# Altium PCB pcb.PcbDoc (part 1 of 2)
Units mm, origin at the board's own origin, x right, y up, seen from the top; angles counter-clockwise.
Board outline 168.75 x 59.75 mm, 2 copper layers (Top Layer, Bottom Layer); 142 components, 131 nets, 492 pads, 85 vias.
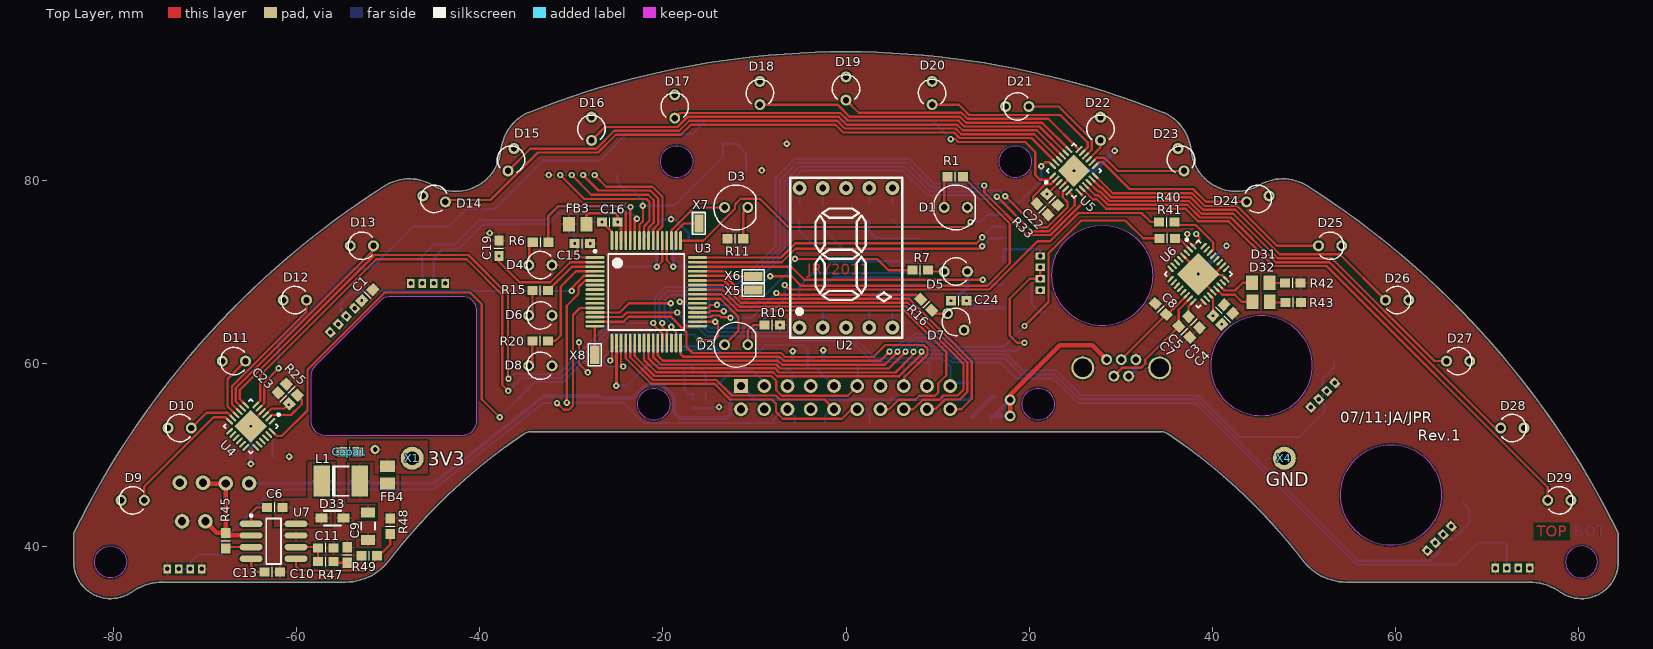
[diagram p0: Top Layer view]
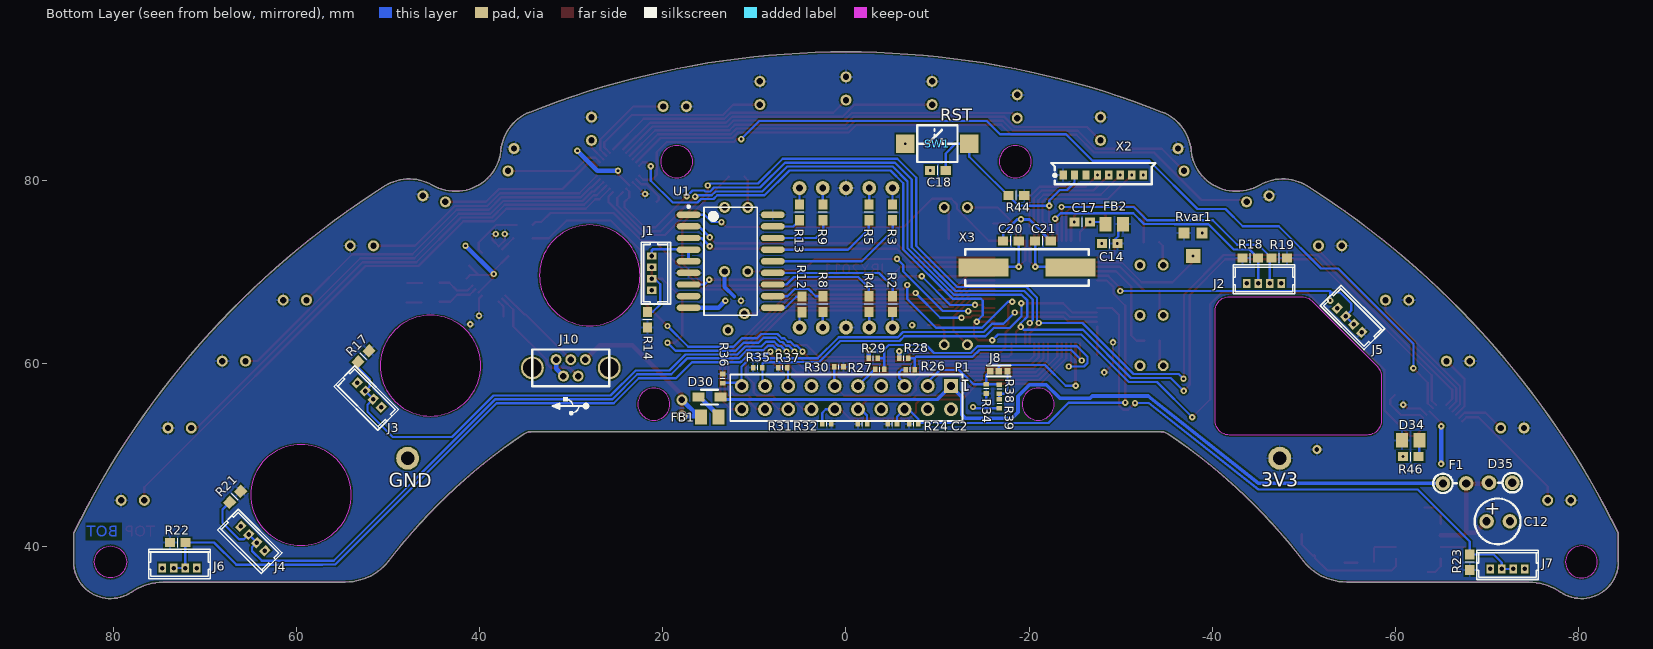
[diagram p1: Bottom Layer view, seen from below]

## Layer stack, top to bottom
Top Layer: signal copper 0.0356
Dielectric: dielectric 0.32, FR-4, Dk 4.8
Bottom Layer: signal copper 0.0356

## Board outline
-78.066,34.976 cw(c-74.626,30.06) -74.626,36.06 -54.704,36.06 ccw(c-54.704,42.06) -49.947,38.403 cw(c0,0.007) -35.249,52.223 -35.248,52.222 cw(c-34.369,51.007) -34.369,52.507 34.369,52.507 cw(c34.369,51.007) 35.248,52.222 35.249,52.223 cw(c0,0.007) 49.947,38.404 49.947,38.403 ccw(c54.704,42.06) 54.704,36.06 74.626,36.06 cw(c74.626,30.06) 78.066,34.976 ccw(c80.365,38.263) 84.376,38.263 84.376,41.441 ccw(c0,0.007) 50.405,79.35 ccw(c47.724,75.13) 45.2,79.446 cw(c42.675,83.762) 37.7,83.267 ccw(c32.724,82.773) 34.563,87.422 ccw(c0,0.007) 0,94.007 ccw(c0,0.007) -34.563,87.422 ccw(c-32.724,82.773) -37.7,83.267 cw(c-42.675,83.762) -45.2,79.446 ccw(c-47.724,75.13) -50.405,79.35 ccw(c0,0.007) -84.376,41.441 -84.376,38.263 ccw(c-80.365,38.263)
cut-out: 78.616,38.263 ccw(c80.366,38.263) 80.366,36.513 ccw(c80.366,38.263) 82.116,38.263 ccw(c80.366,38.263) 80.366,40.013 ccw(c80.366,38.263)
cut-out: -80.364,36.513 cw(c-80.364,38.263) -82.114,38.263 cw(c-80.364,38.263) -80.364,40.013 cw(c-80.364,38.263) -78.614,38.263 cw(c-80.364,38.263)
cut-out: -58.48,53.687 ccw(c-56.929,53.687) -56.929,52.137 ccw(c-56.929,52.187) -56.929,52.137 -41.904,52.137 ccw(c-41.904,53.687) -40.354,53.687 ccw(c-40.404,53.687) -40.354,53.688 -40.354,65.712 ccw(c-41.904,65.712) -41.904,67.263 -49.779,67.263 ccw(c-49.779,65.712) -50.875,66.809 ccw(c-50.84,66.773) -50.877,66.807 ccw(c-50.854,66.762) -50.89,66.798 -58.027,59.661 ccw(c-57.992,59.625) -58.037,59.647 ccw(c-56.929,58.562) -58.48,58.562 ccw(c-58.429,58.562) -58.48,58.562
cut-out: 28.001,64.084 cw(c28.001,69.584) 22.501,69.584 cw(c28.001,69.584) 28.001,75.084 cw(c28.001,69.584) 33.501,69.584 cw(c28.001,69.584)
cut-out: 45.393,54.211 cw(c45.393,59.711) 39.893,59.711 cw(c45.393,59.711) 45.393,65.211 cw(c45.393,59.711) 50.893,59.711 cw(c45.393,59.711)
cut-out: 59.558,40.091 cw(c59.558,45.591) 54.058,45.591 cw(c59.558,45.591) 59.558,51.091 cw(c59.558,45.591) 65.058,45.591 cw(c59.558,45.591)
cut-out: 78.616,38.263 ccw(c80.366,38.263) 80.366,36.513 ccw(c80.366,38.263) 82.116,38.263 ccw(c80.366,38.263) 80.366,40.013 ccw(c80.366,38.263)
cut-out: 21.001,53.757 cw(c21.001,55.507) 19.251,55.507 cw(c21.001,55.507) 21.001,57.257 cw(c21.001,55.507) 22.751,55.507 cw(c21.001,55.507)
cut-out: 18.501,80.257 cw(c18.501,82.007) 16.751,82.007 cw(c18.501,82.007) 18.501,83.757 cw(c18.501,82.007) 20.251,82.007 cw(c18.501,82.007)
cut-out: -18.499,80.257 cw(c-18.499,82.007) -20.249,82.007 cw(c-18.499,82.007) -18.499,83.757 cw(c-18.499,82.007) -16.749,82.007 cw(c-18.499,82.007)
cut-out: -20.999,53.757 cw(c-20.999,55.507) -22.749,55.507 cw(c-20.999,55.507) -20.999,57.257 cw(c-20.999,55.507) -19.249,55.507 cw(c-20.999,55.507)

## Design rules (kind name [scope] priority, off if disabled: settings)
Clearance poly_to_keepout_clearance [InPolygon vs OnLayer('Multi-Layer')] p1: gap=0.17
Clearance [All] p2: gap=0.17
ComponentClearance [All] p1: gap=0.1 collisioncheckmode=3 verticalgap=0.254 showdistances=FALSE
FabricationTestPointUsage TestPointUsage [All] p1: valid=0 allowmultiple=FALSE
FabricationTestpoint Testpoint [All] p1: side=3 testpointundercomponent=TRUE minsize=1.016 maxsize=2.54 preferedsize=1.524 minholesize=0 maxholesize=1.016 preferedholesize=0.813 testpointgrid=0.025 allowsidetop=TRUE allowsidebottom=TRUE usegrid=TRUE gridtolerance=0
HoleSize [All] p1: absolutevalues=TRUE maxlimit=50 minlimit=0.25 maxpercent=80.000 minpercent=20.000
HoleToHoleClearance [All] p1: gap=0.2 allowstackedmicrovias=TRUE
MinimumSolderMaskSliver [All] p1: minsoldermaskwidth=0.01
NetAntennae [All] p1 off: netantennaetolerance=0
PolygonConnect [All] p1: connectstyle=Relief reliefconductorwidth=0.254 reliefentries=4 polygonreliefangle="90 Angle" airgapwidth=0.254
RoutingVias [All] p1: holewidth=0.711 width=1.27 viastyle="Through Hole" minholewidth=0.3 minwidth=0.7 maxholewidth=5 maxwidth=10
SilkToSilkClearance [All] p1 off: silktosilkclearance=0.2
SilkscreenOverComponentPads [All] p1 off: minsilkscreentomaskgap=0.254
SolderMaskExpansion [All] p1: expansion=0.102
Width [All] p1: maxlimit=5 minlimit=0.25 preferedwidth=0.25
19 further rules are at their usual default settings.

## Components (designator, comment, footprint, x,y, rotation, side; value= is the part's Value field where it differs from the comment)
C1 "C" 0603C -52.9,66.825 r315 top
C2 "C" 0402 -6.9,53.35 r270 bottom
C3 "C" 0603c 40.1,65.175 r315 top
C4 "C" 0603c 41.05,64.225 r315 top
C5 "C" 0603c 37.425,65.075 r225 top
C6 "C" 0603C -63.25,44.225 r270 top
C7 "C" 0603c 36.375,64.025 r225 top
C8 "C" 0603c 35,65.3 r45 top
C9 "C" 1206 -52.2,40.7 r90 top
C10 "C" 0603C -57.7,38.3 r270 top
C11 "C" 0603C -57.7,39.8 r270 top
C12 "C_pol" Cpol -70,42.7 r180 bottom
C13 "C" 0603C -63.55,37.175 r270 top
C14 "C" 0603C -29.65,73.05 r90 bottom
C15 "C" 0603c -29.65,73.05 r270 top
C16 "C" 0603c -26.65,75.4 r270 top
C17 "C" 0603C -26.65,75.4 r90 bottom
C18 "C" 0603C -9.2,81.05 r270 bottom
C19 "C" 0603C -37.925,71.7 r0 top
C20 "C" 0603c -18.875,73.35 r90 bottom
C21 "C" 0603c -20.675,73.35 r270 bottom
C22 "C" 0603c 21.95,78.475 r225 top
C23 "C" 0603c -60.85,55.55 r45 top
C24 "C" 0603c 11.475,66.8 r270 top
Capa1 "C" 0603C -53.4,50.3 r90 top
D1 "led" LED5MM 12,77.002 r0 top
D2 "led" LED5MM -12,62 r0 top
D3 "led" LED5MM -12,77.002 r0 top
D4 "led" LED3mm -33.393,70.706 r0 top
D5 "led" LED3mm 12,70.002 r0 top
D6 "led" LED3mm -33.393,65.206 r0 top
D7 "led" LED3mm 12,64.502 r315 top
D8 "led" LED3mm -33.393,59.706 r0 top
D9 "led" LED3mm -77.942,44.998 r0 top
D10 "led" LED3mm -72.812,52.899 r0 top
D11 "led" LED3mm -66.883,60.216 r0 top
D12 "led" LED3mm -60.222,66.881 r0 top
D13 "led" LED3mm -52.901,72.81 r0 top
D14 "led" LED3mm -45,77.94 r345 top
D15 "led" LED3mm -36.606,82.217 r255 top
D16 "led" LED3mm -27.812,85.595 r270 top
D17 "led" LED3mm -18.712,88.033 r270 top
D18 "led" LED3mm -9.408,89.507 r270 top
D19 "led" LED3mm 0,90 r270 top
D20 "led" LED3mm 9.408,89.507 r270 top
D21 "led" LED3mm 18.712,88.033 r0 top
D22 "led" LED3mm 27.812,85.595 r270 top
D23 "led" LED3mm 36.606,82.217 r285 top
D24 "led" LED3mm 45,77.94 r195 top
D25 "led" LED3mm 52.901,72.81 r180 top
D26 "led" LED3mm 60.222,66.881 r180 top
D27 "led" LED3mm 66.883,60.216 r180 top
D28 "led" LED3mm 72.812,52.899 r180 top
D29 "led" LED3mm 77.942,44.998 r180 top
D30 "Schottky" SOD323 13.725,56.275 r90 bottom
D31 "led" 0805 44.375,68.775 r270 top
D32 "led" 0805 44.4,66.7 r270 top
D33 "Schottky" SOD323 -57.3,43.05 r270 top
D34 "led" 0805 -60.75,51.55 r270 bottom
D35 "Zener" R_dil_vertical -72.8,46.925 r0 bottom
F1 "Fuse 1" R_DIL_vertical -65.225,46.85 r180 bottom
FB1 "FB" 0805 15.825,54.1 r270 bottom
FB2 "FB" 0805 -30.275,75.175 r90 bottom
FB3 "FB" 0805 -30.275,75.175 r270 top
FB4 "FB" 0805 -50.1,46.825 r0 top
J1 "MOLEX_embase_4_voies" MOLEX53047-0410 21.225,67.95 r90 bottom
J2 "MOLEX_embase_4_voies" MOLEX53047-0410 -47.55,68.7 r0 bottom
J3 "MOLEX_embase_4_voies" MOLEX53047-0410 53.427,57.827 r225 bottom
J4 "MOLEX_embase_4_voies" MOLEX53047-0410 66.152,42.152 r225 bottom
J5 "MOLEX_embase_4_voies" MOLEX53047-0410 -56.352,63.348 r45 bottom
J6 "MOLEX_embase_4_voies" MOLEX53047-0410 70.95,37.6 r0 bottom
J7 "MOLEX_embase_4_voies" MOLEX53047-0410 -74.15,37.5 r0 bottom
J8 "solder_bridge_3" solder_bridge_3 -16.725,61 r0 bottom
J10 "CON USB FEMALE" mini_USB_vertical 30.075,60.375 r90 bottom
L1 "L" C1812 -55.2,47.1 r0 top
P1 "Header 10X2" header2x10 -11.45,57.49 r0 bottom
R1 "R" 0603C 11.1,80.35 r270 top
R2 "R" 0603c -5.1,67.3 r0 bottom
R3 "R" 0603C -5.1,77.3 r0 bottom
R4 "R" 0603C -2.5,67.3 r0 bottom
R5 "R" 0603C -2.5,77.3 r0 bottom
R6 "R" 0603C -34.225,73.2 r270 top
R7 "R" 0603C 8.95,70.15 r90 top
R8 "R" 0603c 2.5,67.3 r0 bottom
R9 "R" 0603c 2.525,77.3 r0 bottom
R10 "R" 0603C -8.925,64.15 r270 top
R11 "R" 0603C -11.225,73.575 r90 top
R12 "R" 0603c 4.825,67.25 r0 bottom
R13 "R" 0603C 5.1,77.3 r0 bottom
R14 "R" 0603c 21.705,65.598 r0 bottom
R15 "R" 0603c -34.25,67.925 r270 top
R16 "R" 0603c 9.375,65.775 r45 top
R17 "R" 0603C 53.325,60.125 r225 bottom
R18 "R" 0603c -43.325,71.475 r270 bottom
R19 "R" 0603c -48.175,71.475 r90 bottom
R20 "R" 0603c -34.275,62.425 r270 top
R21 "R" 0603C 67.35,44.775 r225 bottom
R22 "R" 0603c 72.175,40.375 r90 bottom
R23 "R" 0603C -68.15,39.075 r0 bottom
R24 "R" 0402 -5.57,53.35 r90 bottom
R25 "R" 0603C -59.95,56.5 r45 top
R26 "R" 0402 -7.525,59.275 r90 bottom
R27 "R" 0402 -4.175,59.3 r90 bottom
R28 "R" 0402 -5.825,60.525 r270 bottom
R29 "R" 0402 -2.475,60.525 r270 bottom
R30 "R" 0402 1.275,59.575 r270 bottom
R31 "R" 0402 2.6,53.35 r270 bottom
R32 "R" 0402 -2.3,53.35 r90 bottom
R33 "R" 0603C 20.875,77.4 r225 top
R34 "R" 0402 -15.325,57.675 r0 bottom
R35 "R" 0402 9.15,59.5 r90 bottom
R36 "R" 0402 13.475,57.8 r180 bottom
R37 "R" 0402 6.4,59.5 r90 bottom
R38 "R" 0402 -16.75,56.65 r180 bottom
R39 "R" 0402 -16.75,55.05 r180 bottom
R40 "R" 0603c 35.9,75.4 r90 top
R41 "R" 0603c 35.95,73.625 r90 top
R42 "R" 0603c 49.675,68.75 r90 top
R43 "R" 0603c 49.7,66.625 r90 top
R44 "R" 0603C -17.775,78.3 r270 bottom
R45 "R" 0603C -67.775,41.45 r180 top
R46 "R" 0603C -62.55,49.775 r90 bottom
R47 "R" 0603C -54.5,38.175 r0 top
R48 "R" 0603C -49.8,41.3 r0 top
R49 "R" 0603C -52.95,38.95 r270 top
Rvar1 "Rvar" TC33X-2 -38.925,74.2 r0 bottom
SW1 "subminswitch" microswitch -6.975,83.975 r180 bottom
U1 "MCP23S08" SOIC18 17.2,76.2 r180 bottom
U2 "TDSR1350" TDSR1350 0,71.5 r0 top
U3 "MSP430F233" PQFP-64 -21.825,67.775 r0 top
U4 "A6282EES-T" QFN24 -62.725,53.65 r135 top
U5 "A6282EES-T" QFN24 22.6,80.45 r315 top
U6 "FT232RQ" FT232RQ_QFN32_M 38.5,69.725 r315 top
U7 "TPS54233" SOIC127P600-8M -62.55,40.525 r0 top
X1 "TP" TP#1 -44.9,47.1 r0 top
X2 "MSP430_JTAG_MOLEX_125" JTAG_MSP_SMALL -23.725,80.55 r180 bottom
X3 "8MHz" Quartz_2 -24.525,70.45 r0 bottom
X4 "TP" TP#2 36.45,43.575 r0 top
X5 "TP" cms_pad -10.125,67.975 r0 top
X6 "TP" cms_pad -10.125,69.475 r0 top
X7 "TP" cms_pad -16.075,75.25 r90 top
X8 "TP" cms_pad -27.45,60.9 r90 top

## Footprints (in the part's own frame and the unit in brackets; to place one, negate y for a bottom-side part, rotate by r counter-clockwise, add the part's x,y. Pads: shape width x height; smd on the part's side, far side on the other; paste and mask are expansions set on the pad)
0402 [mm] "SMD 0402 package, 0.6x1.5mm"
  rect 0.6x0.5 smd: 1(0,0) 2(0,1)
  silkscreen extent -0.25,0.5 0.25,0.5, body extent -0.25,0 0.25,1, height 0.7
0603C [mm] "standard 0603 FP"
  rect 1x1.1 smd: 1(0,0) 2(0,1.7)
  silkscreen extent -0.5,0.85 0.5,0.85, body extent -0.45,-0.25 0.45,2, height 0.7
0603c [mm] "standard 0603 FP"
  rect 1x1.1 smd: 1(0,0) 2(0,1.7)
  silkscreen extent -0.5,0.85 0.5,0.85, body extent -0.45,-0.25 0.45,2, height 0.7
0805 [mm] "standard 0805 FP"
  rect 1.6x1.3 smd: 1(0,0) 2(0,1.9)
  body extent -0.75,0 0.75,2, height 1
1206 [mm] "1206 1.6x3.2mm"
  rect 1.1x1.5 smd: 1(-0.025,0.025) 2(2.975,0.025)
  silkscreen extent 1.08,-0.72 1.88,0.78, body extent -0.17,-0.55 3.12,0.63, height 0.55
C1812 [mm] "Chip Capacitor; Body 4.5 x 3.2 mm (LxW typ)"
  rect 1.8x3.4 smd: 1(-2.075,0) 2(2.075,0)
  silkscreen extent -0.87,-1.6 0.87,1.6
cms_pad [mm] "testpoint_CMS"
  rect 2x1 smd: 1(0,0)
  silkscreen extent -1.2,-0.7 1.2,0.7, body extent -1.2,-0.7 1.2,0.7, height 1
Cpol [mm] "Capa electrolytique"
  round 1.6 hole 0.9: 1(0,0) 2(2.54,0)
  silkscreen extent -1.3,-2.5 3.7,2.5
FT232RQ_QFN32_M [mm] "32-Pin Quad Flat No-Lead 0.5 mm Pitch, IPC Low Density"
  oval 0.9x0.25 smd: 1(-2.55,1.75) 2(-2.55,1.25) 3(-2.55,0.75) 4(-2.55,0.25) 5(-2.55,-0.25) 6(-2.55,-0.75) 7(-2.55,-1.25) 8(-2.55,-1.75) 17(2.55,-1.75) 18(2.55,-1.25) 19(2.55,-0.75) 20(2.55,-0.25) 21(2.55,0.25) 22(2.55,0.75) 23(2.55,1.25) 24(2.55,1.75)
  rect 3.3x3.3 smd: 4(0,0)
  oval 0.25x0.9 smd: 9(-1.75,-2.55) 10(-1.25,-2.55) 11(-0.75,-2.55) 12(-0.25,-2.55) 13(0.25,-2.55) 14(0.75,-2.55) 15(1.25,-2.55) 16(1.75,-2.55) 25(1.75,2.55) 26(1.25,2.55) 27(0.75,2.55) 28(0.25,2.55) 29(-0.25,2.55) 30(-0.75,2.55) 31(-1.25,2.55) 32(-1.75,2.55)
  silkscreen extent -3.67,-2.6 2.6,2.6, body extent -2.58,-2.58 2.58,2.58, height 0.8
header2x10 [mm] "header 2x10 pins, path 2.54mm"
  rect 1.5x1.5 hole 0.9: 1(-0.025,0)
  round 1.5 hole 0.9: 2(-0.025,2.54) 3(2.515,0) 4(2.515,2.54) 5(5.055,0) 6(5.055,2.54) 7(7.595,0) 8(7.595,2.54) 9(10.135,0) 10(10.135,2.54) 11(12.675,0) 12(12.675,2.54) 13(15.215,0) 14(15.215,2.54) 15(17.755,0) 16(17.755,2.54) 17(20.295,0) 18(20.295,2.54) 19(22.835,0) 20(22.835,2.54)
  silkscreen extent -1.3,-1.27 24.1,3.81, body extent -1.1,-1.25 23.9,3.75, height 9
JTAG_MSP_SMALL [mm] "place on the side of the board"
  rect 0.8x1 smd: 1(0,0) 2(1.25,0) 3(2.5,0) 4(3.75,0) 5(5,0) 6(6.25,0) 7(7.5,0) 8(8.75,0)
  silkscreen extent -1.3,-1 10.1,1.3, body extent -1.57,-1.53 10.43,1.97, height 6
LED3mm [mm]
  round 1.2 hole 0.7: 1(-1.27,0) 2(1.27,0)
  silkscreen extent -1.49,-1.5 1.15,1.5, body extent -1.48,-1.53 1.51,1.47, height 5.5
LED5MM [mm]
  round 1.2 hole 0.7: 1(-1.27,0) 2(1.27,0)
  silkscreen extent -2.44,-2.45 2.13,2.45, body extent -2.47,-2.47 2.51,2.52, height 9.5
microswitch [mm] "subminiature tact switch for SMT, case 6x4mm, total 7.3x4mm"
  rect 2x2 smd: 1(-0.5,0) 2(6.5,0)
  silkscreen extent 0.8,-2 5.2,2, body extent 0.02,-1.75 6.02,1.75, height 2.2
mini_USB_vertical [mm] "RECEPTACLE, MINI-USB, TYPE-B, VERT"
  round 1.2 hole 0.7: 1(0,-1.6) 2(-1.8,-0.8) 3(0,0) 4(-1.8,0.8) 5(0,1.6)
  round 2.5 hole 2: 6(-0.9,-4.2) 6(-0.9,4.2)
  silkscreen extent -2.9,-4.2 1.1,4.2, body extent -2.9,-4.3 1.1,4.3, height 9.2
MOLEX53047-0410 [mm] "EMBASE DROITE 4 VOIES"
  rect 0.8x1 hole 0.5: 1(3.75,0) 2(2.5,0) 3(1.25,0) 4(0,0)
  silkscreen extent -1.5,-2.05 5.25,1.15, body extent -1.5,-2.05 5.25,1.15, height 4.2
PQFP-64 [mm] "64 leads, Pitch 0.5mm, case 10x10mm, Low Density"
  oval 2.1x0.3 smd: 1(-5.6,3.75) 2(-5.6,3.25) 3(-5.6,2.75) 4(-5.6,2.25) 5(-5.6,1.75) 6(-5.6,1.25) 7(-5.6,0.75) 8(-5.6,0.25) 9(-5.6,-0.25) 10(-5.6,-0.75) 11(-5.6,-1.25) 12(-5.6,-1.75) 13(-5.6,-2.25) 14(-5.6,-2.75) 15(-5.6,-3.25) 16(-5.6,-3.75) 33(5.6,-3.75) 34(5.6,-3.25) 35(5.6,-2.75) 36(5.6,-2.25) 37(5.6,-1.75) 38(5.6,-1.25) 39(5.6,-0.75) 40(5.6,-0.25) 41(5.6,0.25) 42(5.6,0.75) 43(5.6,1.25) 44(5.6,1.75) 45(5.6,2.25) 46(5.6,2.75) 47(5.6,3.25) 48(5.6,3.75)
  oval 0.3x2.1 smd: 17(-3.75,-5.6) 18(-3.25,-5.6) 19(-2.75,-5.6) 20(-2.25,-5.6) 21(-1.75,-5.6) 22(-1.25,-5.6) 23(-0.75,-5.6) 24(-0.25,-5.6) 25(0.25,-5.6) 26(0.75,-5.6) 27(1.25,-5.6) 28(1.75,-5.6) 29(2.25,-5.6) 30(2.75,-5.6) 31(3.25,-5.6) 32(3.75,-5.6) 49(3.75,5.6) 50(3.25,5.6) 51(2.75,5.6) 52(2.25,5.6) 53(1.75,5.6) 54(1.25,5.6) 55(0.75,5.6) 56(0.25,5.6) 57(-0.25,5.6) 58(-0.75,5.6) 59(-1.25,5.6) 60(-1.75,5.6) 61(-2.25,5.6) 62(-2.75,5.6) 63(-3.25,5.6) 64(-3.75,5.6)
  silkscreen extent -5.72,-4.15 4.15,4.57, body extent -5,-5 5,5, height 1.6
QFN24 [mm] "QFN 24 pins, 4x4mm, 0.5mm"
  oval 0.25x0.95 smd: 1(-0.013,0.004) 2(0.487,0.004) 3(0.987,0.004) 4(1.487,0.004) 5(1.987,0.004) 6(2.487,0.004) 13(2.487,4.054) 14(1.987,4.054) 15(1.487,4.054) 16(0.987,4.054) 17(0.487,4.054) 18(-0.013,4.054)
  oval 0.95x0.25 smd: 7(3.262,0.779) 8(3.262,1.279) 9(3.262,1.779) 10(3.262,2.279) 11(3.262,2.779) 12(3.262,3.279) 19(-0.788,3.279) 20(-0.788,2.779) 21(-0.788,2.279) 22(-0.788,1.779) 23(-0.788,1.279) 24(-0.788,0.779)
  rect 2.5x2.5 smd: 25(1.237,2.029)
  silkscreen extent -0.86,-1.15 3.34,4.13, body extent -0.84,-0.05 3.31,4.1, height 1
Quartz_2 [mm]
  rect 5.5x2 smd: 1(0,0) 2(9.5,0)
  silkscreen extent -2,-2 11.5,2
R_dil_vertical [mm] "DIL resistor with vertical placement"
  round 1.6 hole 0.9: 1(0,0) 2(2.54,0)
  silkscreen extent -1.06,-1.06 1.53,1.06, body extent -1.24,-1.25 2.95,1.25, height 10.9
R_DIL_vertical [mm] "DIL resistor with vertical placement"
  round 1.6 hole 0.9: 1(0,0) 2(2.54,0)
  silkscreen extent -1.06,-1.06 1.53,1.06, body extent -1.24,-1.25 2.95,1.25, height 10.9
SOD323 [mm] "SOD323F 1.8x1.35mm, total legth 2.7mm, lead width 0.4mm"
  rect 1x1.3 smd: 1(0,0) 2(0,2.4)
  silkscreen extent -0.8,0.3 0.8,2.1
SOIC18 [mm] "low density SOIC18, pitch 1.27mm, case 7.5x11.5mm"
  oval 2.6x0.7 smd: 1(0,0) 2(0,-1.27) 3(0,-2.54) 4(0,-3.81) 5(0,-5.08) 6(0,-6.35) 7(0,-7.62) 8(0,-8.89) 9(0,-10.16) 10(9.2,-10.16) 11(9.2,-8.89) 12(9.2,-7.62) 13(9.2,-6.35) 14(9.2,-5.08) 15(9.2,-3.81) 16(9.2,-2.54) 17(9.2,-1.27) 18(9.2,0)
  silkscreen extent -0.13,-10.98 7.5,1.02, body extent 0.8,-11.03 8.4,0.87, height 2.65
SOIC127P600-8M [mm] "SOIC, 8-Leads, Body 4.9x3.9mm, Pitch 1.27mm, IPC Low Density"
  oval 2.5x0.7 smd: 1(-2.45,1.905) 2(-2.45,0.635) 3(-2.45,-0.635) 4(-2.45,-1.905) 5(2.45,-1.905) 6(2.45,-0.635) 7(2.45,0.635) 8(2.45,1.905)
  silkscreen extent -2.57,-2.5 0.8,2.93, body extent -2,-2.5 2,2.5, height 1.75
solder_bridge_3 [mm]
  rect 0.7x0.7 smd: 1(0.025,1.875) 2(0.975,1.875) 3(-0.925,1.875)
  silkscreen extent -1.25,1.28 1.3,2.47
TC33X-2 [mm] "Bourns trimmer SMD"
  rect 1.2x1.2 smd: 1(0,0) 2(2,0)
  rect 1.6x1.5 smd: 3(1,2.5)
  body extent -0.5,-0.1 2.5,2.9, height 1.4
TDSR1350 [mil] "Common Anode 7 seg led display"
  round 60 hole 30: 1(-200,-300) 2(-100,-300) 3(0,-300) 4(100,-300) 5(200,-300) 6(200,300) 7(100,300) 8(0,300) 9(-100,300) 10(-200,300)
  silkscreen extent -240,-344 242,345, body extent -239,-344 243,345, height 276
TP#1 [mm] "Test point"
  round 2.5 hole 1.5: 1(-2.5,2.5)
TP#2 [mm] "Test point"
  round 2.5 hole 1.5: 1(11.45,6.025)

## Part data
F1: "Fuse"
J1 J2 J3 J4 J5 J6 J7: "53047-0410 MOLEX"
J10: "connecteur usb femelle"
P1: "Header, 10-Pin, Dual row"
SW1: "subminiature tact switch for SMT"
U1: "SPI 8 IO expander"
U6: "QFN32 UART-USB bridge"
X3: library part Quartz, "Quartz smd"

## Via types
v1: diameter 0.7, hole 0.3, Top Layer to Bottom Layer, tented both sides, 82 vias
v2: diameter 1.2, hole 0.7, Top Layer to Bottom Layer, tented both sides, 2 vias
v3: diameter 1, hole 0.5, Top Layer to Bottom Layer, tented both sides, 1 vias

## Nets (pads, with @x,y where several pads share a name; then routed paths per layer and width w, separated by ;. In a path a pad name is that pad's centre, name@x,y a point inside that pad or via, vN(x,y) a via of type N, cw(c..) or ccw(c..) an arc to the next point about the centre after c; other vN are vias at no path point)
3V3: C2.1 C3.1 C4.1 C14.1 C15.1 C22.1 C23.1 C24.1 Capa1.1 D9.1 D10.1 D11.1 D12.1 D13.1 D14.1 D15.1 D16.1 D17.1 D18.1 D19.1 D20.1 D21.1 D22.1 D23.1 D24.1 D25.1 D26.1 D27.1 D28.1 D29.1 D34.1 FB2.1 FB4.2 J5.4 R14.2 R17.2 R18.1 R19.1 R21.2 R22.2 R23.2 R24.2 R30.2 R31.2 R32.2 R34.2 R35.2 R36.2 R37.2 R44.2 Rvar1.2 U1.6 U1.18 U2.3 U2.8 U3.1 U4.3 U5.3 U6.1 U6.19 X1.1 X2.1 | length 20.8
  Top Layer w0.25: U4.3@-63.426,54.345 -62.746,55.025 -61.375,55.025 C23.1@-60.85,55.55 ; C15.1@-29.35,72.7 -29.35,71.95 -28.925,71.525 U3.1@-27.425,71.525 ; v1(-29.175,62.25) -29.175,59.925 v1(-28.225,58.975) ; C22.1@22.221,78.253 22.221,78.675 U5.3@23.301,79.755 ; v1(37.275,74.1) 37.275,73.425 U6.1@37.934,72.766 38.625,73.456 38.625,73.75 v1(38.275,74.1) ; U6.19@39.773,67.392 40.1,67.064 v1(40.1,65.175)
  Bottom Layer w0.25: FB2.1@-30.275,75.175 -30.275,75.05 -29.75,74.525 -29.75,73.85 -29.35,73.45 C14.1@-29.35,72.7 ; -15.325,55.975 R34.2@-15.325,56.675
  other v1: -60.9,55.45 41.05,64.225 11.475,66.8 -29.65,73.05 21.95,78.475
  other v3: -51.45,50.55
3V3A: C16.1 C17.1 FB2.2 U3.64 | length 4
  Top Layer w0.25: v1(-26.65,75.4) -25.575,74.325 U3.64@-25.575,73.375
  Bottom Layer w0.25: FB2.2@-28.15,75.4 v1(-26.65,75.4)
7S_A: R9.2 U1.16 | length 7.1
  Bottom Layer w0.25: R9.2@2.5,75.6 2.5,74.45 3.29,73.66 U1.16@8,73.66 U1.16@8.1,73.66
7S_B: R13.2 U1.17 | length 3.3
  Bottom Layer w0.25: R13.2@5.1,75.6 5.77,74.93 U1.17@8.1,74.93
7S_C: R8.1 U1.11 | length 6.3
  Bottom Layer w0.25: R8.1@2.5,67.3 3.3,67.3 4.1,68.1 5.612,68.1 6.402,67.31 U1.11@8,67.31 U1.11@8.1,67.31
7S_C\S\: U1.7 U3.46 | length 34.2
  Top Layer w0.25: U3.46@-16.225,70.525 -5.975,70.525 -4.55,69.1 v1(14.95,69.1)
  Bottom Layer w0.25: v1(14.95,69.1) 15.47,68.58 U1.7@17.2,68.58
7S_CLK: U1.1 U3.49 | length 39.3
  Top Layer w0.25: U3.49@-18.075,73.375 -15.6,73.375 -12.125,76.85 -12.125,77.325 -11.5,77.95 -9.4,77.95 -6.32,74.87 13.095,74.87 v1@13.613,75.387
  Bottom Layer w0.25: v1(13.6,75.4) 14.675,75.4 15.475,76.2 U1.1@17.2,76.2
7S_D: R4.1 U1.12 | length 12.4
  Bottom Layer w0.25: R4.1@-2.5,67.3 -2.5,68.25 -1.35,69.4 5.675,69.4 6.495,68.58 U1.12@8.1,68.58
7S_DP: R12.1 U1.10 | length 3.8
  Bottom Layer w0.25: R12.1@4.825,67.25 5.425,67.25 6.635,66.04 U1.10@8,66.04 U1.10@8.1,66.04
7S_E: R2.1 U1.13 | length 14.9
  Bottom Layer w0.25: R2.1@-5.1,67.3 -5.1,68.35 -3.6,69.85 U1.13@8,69.85 U1.13@8.1,69.85
7S_F: R5.2 U1.15 | length 12.5
  Bottom Layer w0.25: R5.2@-2.5,75.6 -2.5,74.675 -0.215,72.39 U1.15@8,72.39 U1.15@8.1,72.39
7S_G: R3.2 U1.14 | length 15.7
  Bottom Layer w0.25: R3.2@-5.1,75.6 -5.1,74.475 -1.745,71.12 U1.14@8.1,71.12
7S_MISO: U1.3 U3.47 | length 34.5
  Top Layer w0.25: U3.47@-16.225,71.025 -7.012,71.025 -5.537,72.5 14.625,72.5 v1(14.9,72.775)
  Bottom Layer w0.3: v1(14.9,72.775) 15.75,73.625 17.165,73.625 U1.3@17.2,73.66
7S_MOSI: U1.2 U3.48 | length 34.8
  Top Layer w0.25: U3.48@-16.225,71.525 -7.106,71.525 -5.531,73.1 14.25,73.1 v1(14.875,73.725)
  Bottom Layer w0.3: v1(14.875,73.725) 16.08,74.93 U1.2@17.2,74.93
AGND: C16.2 C17.2 FB3.2 U3.62 | length 7
  Top Layer w0.3: FB3.2@-28.375,75.175 -28.375,76.15 -28.15,76.375 -25.225,76.375 -24.95,76.1 v1(-24.95,75.4) ; U3.62@-24.575,73.375 C16.2@-24.575,75.025
BUT_N: J4.2 J4.3 R21.1 U3.25 | length 109.4
  Top Layer w0.25: U3.25@-21.575,62.175 -21.575,60.496 -20.499,59.42 -7.771,59.42 -7.326,58.975 5.4,58.975 7.375,60.95 v1(7.375,61.225)
  Bottom Layer w0.25: v1(7.375,61.225) 7.375,61.287 7.983,61.895 8.515,61.895 8.518,61.898 9.031,61.385 10.846,61.385 11.721,60.51 17.365,60.51 19.105,58.77 22.811,58.77 25.551,56.03 38.351,56.03 55.981,38.4 63.825,38.4 64.9,39.475 64.9,39.868 J4.2@64.384,40.384 J4.3@65.268,41.268 ; J4.3@65.268,40.932 J4.3@65.268,41.268 ; R21.1@67.35,44.775 68.125,44 68.125,42.55 66.325,40.75 65.786,40.75 J4.3@65.268,41.268
BUT_SP: J1.2 J1.3 R14.1 U3.27 | length 61
  Top Layer w0.25: U3.27@-20.575,62.175 -20.575,60.825 -20.01,60.26 -7.423,60.26 -6.978,59.815 4.227,59.815 5.625,61.213 v1(5.625,61.25) ; v1(19.5,62.225) 18.675,62.225 17.9,63 17.9,67.025 20.075,69.2 J1.3@21.225,69.2 J1.2@21.225,70.45
  Bottom Layer w0.25: v1(5.625,61.25) 5.625,61.287 6.233,61.895 6.539,61.895 6.934,62.29 7.19,62.29 7.655,62.755 9.02,62.755 9.55,62.225 11.2,62.225 12.075,61.35 18.625,61.35 v1(19.5,62.225) ; J1.2@21,70.225 J1.2@21.225,70.45 ; J1.3@21.292,69.2 J1.3@21.225,69.2 20.9,69.2 20.3,68.6 20.3,66.404 21.106,65.598 R14.1@21.705,65.598
BUT_ST: J3.2 J3.3 R17.1 U3.26 | length 89.2
  Top Layer w0.25: U3.26@-21.075,62.175 -21.075,60.66 -20.255,59.84 -7.597,59.84 -7.152,59.395 4.682,59.395 6.5,61.213 v1(6.5,61.25)
  Bottom Layer w0.25: v1(6.5,61.25) 6.5,61.262 7.108,61.87 7.364,61.87 7.829,62.335 8.74,62.335 9.27,61.805 11.02,61.805 11.895,60.93 17.539,60.93 19.279,59.19 22.985,59.19 25.725,56.45 38.525,56.45 43.05,51.925 49.525,51.925 52.279,54.679 52.279,55.439 J3.2@51.659,56.059 J3.3@52.543,56.943 ; J3.3@52.543,56.607 J3.3@52.543,56.943 ; R17.1@53.325,60.125 53.325,59.525 52.025,58.225 52.025,57.461 J3.3@52.543,56.943
CLK: U3.31 U4.6 U5.6 | length 134.4
  Top Layer w0.25: U4.6@-64.486,55.406 -64,55.892 -64,58.653 -51.323,71.33 -41.451,71.33 -37.55,67.429 -37.55,57.6 v1(-36.9,56.95) ; v1(-19.1,63.95) -18.575,63.425 U3.31@-18.575,62.175 ; v1(16.488,78.187) 20.27,74.405 22.174,74.405 25,77.231 25,78.056 U5.6@24.361,78.694
  Bottom Layer w0.25: v1(-36.9,56.95) -35.475,58.375 -31.15,58.375 -25.9,63.625 -19.425,63.625 v1(-19.1,63.95) -19.1,64.36 -19.82,65.08 -19.82,66.823 -19.183,67.46 -11.802,67.46 -6.725,72.537 -6.725,79.85 -5.105,81.47 6.43,81.47 9.15,78.75 14.244,78.75 14.659,78.335 16.34,78.335 v1(16.488,78.187)
EMBRAY_IN: P1.10 R32.1 U3.21 | length 28.4
  Top Layer w0.25: U3.21@-23.575,62.175 -23.575,60.643 -21.077,58.145 -14.17,58.145 -12.47,56.445 -7.67,56.445 -7.23,56.005 -2.345,56.005 P1.10@-1.29,54.95
  Bottom Layer w0.25: R32.1@-2.3,53.5 -2.3,54.28 P1.10@-1.26,55.32
GND: C1.2 C3.2 C4.2 C5.2 C7.2 C8.2 C9.2 C11.2 C12.2 C13.2 C14.2 C15.2 C18.1 C19.2 C20.2 C21.2 C22.2 C23.2 C24.2 Capa1.2 D1.2 D4.2 D5.2 D6.2 D7.2 D8.2 D33.2 D35.1 FB3.1 J1.1 J1.4 J2.1 J2.4 J3.1 J3.4 J4.1 J4.4 J5.1 J6.1 J6.4 J7.1 J7.4 J10.4 J10.5 J10.6 P1.2 R10.2 R11.2 R25.2 R28.1 R29.1 R33.2 R39.1 R42.1 R43.1 R46.2 R47.2 R49.1 Rvar1.1 SW1.1 U1.4 U1.5 U1.9 U3.63 U4.4 U4.25 U5.4 U5.25 U6.4 U6.17 U6.20 U6.24 U6.26 U7.7 X2.8 X4.1 | length 54.5
  Top Layer w0.25: U4.25@-65.034,53.444 U4.4@-63.779,54.699 ; U5.4@23.654,79.401 U5.25@24.909,80.656 ; U6.4@36.874,71.705 U6.4@38.5,70.079 ; v1(38.5,69.725) U6.4@38.609,69.616 ; U6.20@40.126,67.745 38.609,69.262 U6.4@38.609,69.616 ; U6.4@40.268,69.725 U6.26@41.187,70.644 ; U6.24@41.451,69.249 41.084,69.616 U6.4@38.609,69.616
  Bottom Layer w0.25: v1(-65.034,53.09) v1@-65.025,53.081 ; R39.1@-16.75,55.05 -14.025,55.05 v1(-13.875,55.2)
  Bottom Layer w0.3: C21.2@-22.375,73.35 -20.05,75.675 -18.675,75.675 -17.175,74.175 C20.2@-17.175,73.35 ; U1.4@17.185,72.375 U1.4@17.2,72.39 ; U1.5@17.2,71.12 U1.4@17.2,72.39 ; J1.1@21.225,71.7 21.225,72.29 21.07,72.445 17.255,72.445 U1.4@17.2,72.39
  Bottom Layer w0.4: 12.225,67.275 13.27,68.32 D5.2@13.27,70.002
  Bottom Layer w0.5: v1(-65.025,48.975) v1@-65.025,53.081 ; R28.1@-5.825,60.525 v1(-5.825,61.3) ; R29.1@-2.475,60.525 v1(-2.475,61.4) ; v1(13.175,66.8) 13.935,66.04 U1.9@17.2,66.04 ; v1(24.909,81.01) 27.16,81.01 v1(29.35,83.2) ; J10.4@30.875,58.575 31.675,59.375 J10.5@31.675,60.375 ; v1(38.5,69.725) 38.5,69.75 v1(41.575,72.825)
  other v1: -60.85,49.775 -7.225,64.15 -27.95,73.05 -38.925,74.2 -19.125,75.7 -32.475,80.55 -9.2,81.05 -6.475,83.975
IN_NEUTRE_IN: J8.2 P1.3 R34.1 R38.2 | length 10.7
  Bottom Layer w0.25: R38.2@-16.75,57.675 R34.1@-15.325,57.675 ; J8.2@-15.75,59.125 -15.325,58.7 R34.1@-15.325,57.675 ; P1.3@-8.88,57.86 -10.27,59.25 -12.35,59.25 -13.925,57.675 R34.1@-15.325,57.675
IN_OIL_IN: P1.9 R27.2 | length 2.6
  Bottom Layer w0.25: R27.2@-3.175,59.3 -3.1,59.3 P1.9@-1.29,57.49
IN_ROT_IN: P1.5 R26.2 | length 2.2
  Bottom Layer w0.25: R26.2@-6.525,59.275 -6.1,59.275 -5.825,59 -5.825,58.375 P1.5@-6.34,57.86
LE: U3.28 U4.7 U5.7 | length 136.3
  Top Layer w0.25: U4.7@-65.582,55.406 -66.25,56.073 -66.25,57.068 -51.518,71.8 -41.256,71.8 -36.925,67.469 v1@-36.925,58.25 ; v1(-21.075,64.375) -21.075,64.24 -20.075,63.24 U3.28@-20.075,62.175 ; v1(15.1,79.4) 15.1,78.663 19.778,73.985 22.348,73.985 25.95,77.587 25.95,78.202 U5.7@25.457,78.694
  Bottom Layer w0.25: v1(-36.875,58.275) -36.35,58.8 -31.425,58.8 -25.85,64.375 v1(-21.075,64.375) -20.87,64.58 -20.87,67.145 -19.715,68.3 -12.15,68.3 -7.665,72.785 -7.665,80.239 -5.594,82.31 6.919,82.31 9.604,79.625 14.875,79.625 v1(15.1,79.4)
LED_M1: R20.2 U3.4 | length 11.4
  Top Layer w0.25: R20.2@-32.575,62.425 -31.75,62.425 -31.175,63 -31.175,68.35 -29.5,70.025 U3.4@-27.425,70.025
LED_M2: R15.2 U3.3 | length 6.2
  Top Layer w0.25: R15.2@-32.55,67.925 -29.95,70.525 U3.3@-27.425,70.525
LED_M3: R6.2 U3.61 | length 15.1
  Top Layer w0.25: R6.2@-32.525,73.2 -32.525,76.075 -31.45,77.15 -24.75,77.15 -24.075,76.475 U3.61@-24.075,73.375
LED_N: D2.1 U3.39 | length 9
  Top Layer w0.25: U3.39@-16.225,67.025 -13.75,67.025 -11.75,65.025 -11.75,63.52 D2.1@-13.27,62
LED_OIL: D3.1 U3.51 | length 8
  Top Layer w0.25: U3.51@-19.075,73.375 -19.075,74.5 -16.573,77.002 D3.1@-13.27,77.002
LED_T1: R16.2 U3.35 | length 26
  Top Layer w0.25: U3.35@-16.225,65.025 -14.775,65.025 -14.595,65.205 -13.828,65.205 -13.628,65.005 -12.68,65.005 v1(-12.625,64.95) ; v1(-7.6,67.65) -7.4,67.45 7.7,67.45 R16.2@8.173,66.977
  Bottom Layer w0.25: v1(-12.625,64.95) -10.3,64.95 v1(-7.6,67.65)
LED_T2: R7.2 U3.36 | length 26.8
  Top Layer w0.25: U3.36@-16.225,65.525 -14.95,65.525 -14.8,65.675 v1(-13.35,65.675) ; v1(-5.575,71.375) 3.425,71.375 4.65,70.15 R7.2@7.25,70.15
  Bottom Layer w0.25: v1(-13.35,65.675) -10.575,65.675 -6.25,70 -6.25,70.7 v1(-5.575,71.375)
LED_T3: R1.2 U3.37 | length 48.6
  Top Layer w0.25: U3.37@-16.225,66.025 -15.15,66.025 -14.825,66.35 v1(-14.1,66.35) ; v1(-8.275,69.475) -5.925,69.475 -4.905,68.455 15.455,68.455 17.9,70.9 17.9,75.25 R1.2@12.8,80.35
  Bottom Layer w0.25: v1(-14.1,66.35) -11.4,66.35 v1(-8.275,69.475)
MODE_0: J2.3 R19.2 U3.60 | length 31.5
  Top Layer w0.25: U3.60@-23.575,73.375 v1@-23.575,77.025
  Bottom Layer w0.25: R19.2@-46.475,71.475 -46.475,71.492 -45.044,72.923 -42.752,72.923 -40.075,75.6 -36.075,75.6 -36.07,75.605 -32.895,75.605 -31.45,77.05 v1(-23.55,77.05)
  Bottom Layer w0.3: J2.3@-46.3,68.7 R19.2@-46.3,71.3
MODE_1: J2.2 R18.2 U3.59 | length 29.7
  Top Layer w0.25: U3.59@-23.075,73.375 -23.075,75.55 v1(-22.85,75.775)
  Bottom Layer w0.25: R18.2@-45.025,71.475 -44.1,72.4 -42.375,72.4 -39.595,75.18 -35.901,75.18 -35.896,75.185 -32.565,75.185 -31.375,76.375 -23.45,76.375 v1(-22.85,75.775)
  Bottom Layer w0.3: J2.2@-45.05,68.7 R18.2@-45.05,71.45
MOT+_OUT: P1.16 U3.41 | length 42.8
  Top Layer w0.25: U3.41@-16.225,68.025 -13.519,68.025 -11.659,66.165 -6.985,66.165 -6.98,66.17 6.574,66.17 12.83,59.914 12.83,57.075 12.2,56.445 10.645,56.445 10.2,56 8.4,56 7.35,54.95 6.73,54.95 P1.16@6.36,55.32